# EAGLE board t1 (EAGLE 6.5.0)

Size 290.5 x 87.63 mm. Coordinates in mm from the lower left corner, seen from the top.
Outline: 190.5,0 290.5,0 290.5,80 190.5,80 190.5,0
Copper layers (1*16): Top 0.035mm / dielectric 1.5mm / Bottom 0.035mm
Design rules "default": minimum track width 10mil, minimum drill 24mil, track to track 8mil, track to pad 8mil, pad to pad 8mil, via to via 8mil, smd to smd 8mil, copper to edge 40mil, drill to drill 8mil, minimum pad ring 10mil, minimum via ring 8mil, stop-mask expansion 4mil, vias tented up to drill 0mil, thermal gap 10mil

## Footprints (pad centres in the part's own frame; a part is rotated, then mirrored left to right if it is on the bottom)
BEAGLEBONE_SHIELD = drill 1 square: 1 4.445,19.05; 47 52.705,19.05 | drill 1: 2 1.905,19.05; 3 4.445,21.59; 4 1.905,21.59; 5 4.445,24.13; 6 1.905,24.13; 7 4.445,26.67; 8 1.905,26.67; 9 4.445,29.21; 10 1.905,29.21; 11 4.445,31.75; 12 1.905,31.75; 13 4.445,34.29; 14 1.905,34.29; 15 4.445,36.83; 16 1.905,36.83; 17 4.445,39.37; 18 1.905,39.37; 19 4.445,41.91; 20 1.905,41.91; 21 4.445,44.45; 22 1.905,44.45; 23 4.445,46.99; 24 1.905,46.99; 25 4.445,49.53; 26 1.905,49.53; 27 4.445,52.07; 28 1.905,52.07; 29 4.445,54.61; 30 1.905,54.61; 31 4.445,57.15; 32 1.905,57.15; 33 4.445,59.69; 34 1.905,59.69; 35 4.445,62.23; 36 1.905,62.23; 37 4.445,64.77; 38 1.905,64.77; 39 4.445,67.31; 40 1.905,67.31; 41 4.445,69.85; 42 1.905,69.85; 43 4.445,72.39; 44 1.905,72.39; 45 4.445,74.93; 46 1.905,74.93; 48 50.165,19.05; 49 52.705,21.59; 50 50.165,21.59; 51 52.705,24.13; 52 50.165,24.13; 53 52.705,26.67; 54 50.165,26.67; 55 52.705,29.21; 56 50.165,29.21; 57 52.705,31.75; 58 50.165,31.75; 59 52.705,34.29; 60 50.165,34.29; 61 52.705,36.83; 62 50.165,36.83; 63 52.705,39.37; 64 50.165,39.37; 65 52.705,41.91; 66 50.165,41.91; 67 52.705,44.45; 68 50.165,44.45; 69 52.705,46.99; 70 50.165,46.99; 71 52.705,49.53; 72 50.165,49.53; 73 52.705,52.07; 74 50.165,52.07; 75 52.705,54.61; 76 50.165,54.61; 77 52.705,57.15; 78 50.165,57.15; 79 52.705,59.69; 80 50.165,59.69; 81 52.705,62.23; 82 50.165,62.23; 83 52.705,64.77; 84 50.165,64.77; 85 52.705,67.31; 86 50.165,67.31; 87 52.705,69.85; 88 50.165,69.85; 89 52.705,72.39; 90 50.165,72.39; 91 52.705,74.93; 92 50.165,74.93
DIL16 = drill 0.813 long: 1 -8.89,-3.81; 2 -6.35,-3.81; 3 -3.81,-3.81; 4 -1.27,-3.81; 5 1.27,-3.81; 6 3.81,-3.81; 7 6.35,-3.81; 8 8.89,-3.81; 9 8.89,3.81; 10 6.35,3.81; 11 3.81,3.81; 12 1.27,3.81; 13 -1.27,3.81; 14 -3.81,3.81; 15 -6.35,3.81; 16 -8.89,3.81
LED3MM = drill 0.813 pad 1.676 octagon: A -1.27,0; K 1.27,0
0207/12 = drill 0.813 octagon: 1 -6.35,0; 2 6.35,0
SIL9 = drill 0.813 long: 1 -10.16,0; 2 -7.62,0; 3 -5.08,0; 4 -2.54,0; 5 0,0; 6 2.54,0; 7 5.08,0; 8 7.62,0; 9 10.16,0
MA05-2 = drill 1.016 octagon: 1 -5.08,-1.27; 2 -5.08,1.27; 3 -2.54,-1.27; 4 -2.54,1.27; 5 0,-1.27; 6 0,1.27; 7 2.54,-1.27; 8 2.54,1.27; 9 5.08,-1.27; 10 5.08,1.27
MA10-2 = drill 1.016 octagon: 1 -11.43,-1.27; 2 -11.43,1.27; 3 -8.89,-1.27; 4 -8.89,1.27; 5 -6.35,-1.27; 6 -6.35,1.27; 7 -3.81,-1.27; 8 -3.81,1.27; 9 -1.27,-1.27; 10 -1.27,1.27; 11 1.27,-1.27; 12 1.27,1.27; 13 3.81,-1.27; 14 3.81,1.27; 15 6.35,-1.27; 16 6.35,1.27; 17 8.89,-1.27; 18 8.89,1.27; 19 11.43,-1.27; 20 11.43,1.27

## Placement (x,y rotation side)
BBB  BEAGLEBONE_OUTLINE  [BEAGLEBONE_SHIELD]  0,1.27 0 top
IC1  74HC595N  [DIL16]  166.37,50.8 0 top
LED0  [LED3MM]  2.54,-43.18 0 top  (outside the outline)
LED1  [LED3MM]  2.54,-2.54 0 top
LED2  [LED3MM]  2.54,-7.62 0 top  (outside the outline)
LED3  [LED3MM]  2.54,-12.7 0 top  (outside the outline)
LED4  [LED3MM]  2.54,-17.78 0 top  (outside the outline)
LED5  [LED3MM]  2.54,-22.86 0 top  (outside the outline)
LED6  [LED3MM]  2.54,-27.94 0 top  (outside the outline)
LED7  [LED3MM]  2.54,-33.02 0 top  (outside the outline)
LED8  [LED3MM]  2.54,-38.1 0 top  (outside the outline)
R1  10k  [0207/12]  7.62,-49.53 0 top  (outside the outline)
RN1  [SIL9]  124.46,81.28 0 top
RN2  [SIL9]  271.78,73.66 0 top
SV1  [MA05-2]  143.51,85.09 0 top
SV2  [MA10-2]  163.83,85.09 0 top

## Library data of the parts
BBB = local
IC1 = 74xx-eu
LED0 LED1-LED8 = adafruit
R1 = rcl
RN1 RN2 = resistor-sil; OC_FARNELL: unknown; OC_NEWARK: unknown
SV1 SV2 = con-lstb; OC_FARNELL: unknown; OC_NEWARK: unknown

## Nets
+3V3: IC1.16 R1.2
/OE_RLY: IC1.13 R1.1
AIN0: BBB.85
DATA_RLY: BBB.11 IC1.14
GND: BBB.1 BBB.2 BBB.47 BBB.48 BBB.89 BBB.90 BBB.91 BBB.92 IC1.8 RN2.1
N$1: LED7.K RN2.9
N$2: LED1.K RN2.3
N$3: LED3.K RN2.5
N$4: LED2.K RN2.4
N$5: LED4.K RN2.6
N$6: LED6.K RN2.8
N$7: LED0.K RN2.2
N$8: IC1.15 LED0.A
N$9: IC1.1 LED1.A
N$10: LED5.K RN2.7
N$11: IC1.2 LED2.A
N$12: IC1.3 LED3.A
N$13: IC1.4 LED4.A
N$14: IC1.5 LED5.A
N$16: IC1.6 LED6.A
N$17: IC1.7 LED7.A
SYS_5V: BBB.53
VDD_3V3EXP: BBB.49 BBB.50
VDD_5V: BBB.51 BBB.52

## Tracks (layer width: path | path; a pad name or v marks a point on that pad's centre or on a via)
+3V3  (1 unrouted)
/OE_RLY  (1 unrouted)
DATA_RLY  (1 unrouted)
GND  (9 unrouted)
N$1  (1 unrouted)
N$2  (1 unrouted)
N$3  (1 unrouted)
N$4  (1 unrouted)
N$5  (1 unrouted)
N$6  (1 unrouted)
N$7  (1 unrouted)
N$8  (1 unrouted)
N$9  (1 unrouted)
N$10  (1 unrouted)
N$11  (1 unrouted)
N$12  (1 unrouted)
N$13  (1 unrouted)
N$14  (1 unrouted)
N$16  (1 unrouted)
N$17  (1 unrouted)
VDD_3V3EXP  (1 unrouted)
VDD_5V  (1 unrouted)